# Altium PCB PCB_OP1.PcbDoc
Units mm, origin at the board's own origin, x right, y up, seen from the top; angles counter-clockwise.
Board outline 105.42 x 121.65 mm, 2 copper layers (Top Layer, Bottom Layer), stack 0.532 mm thick; 92 components, 60 nets, 268 pads, 0 vias.
Unrouted connection lines stored in the file: 126.
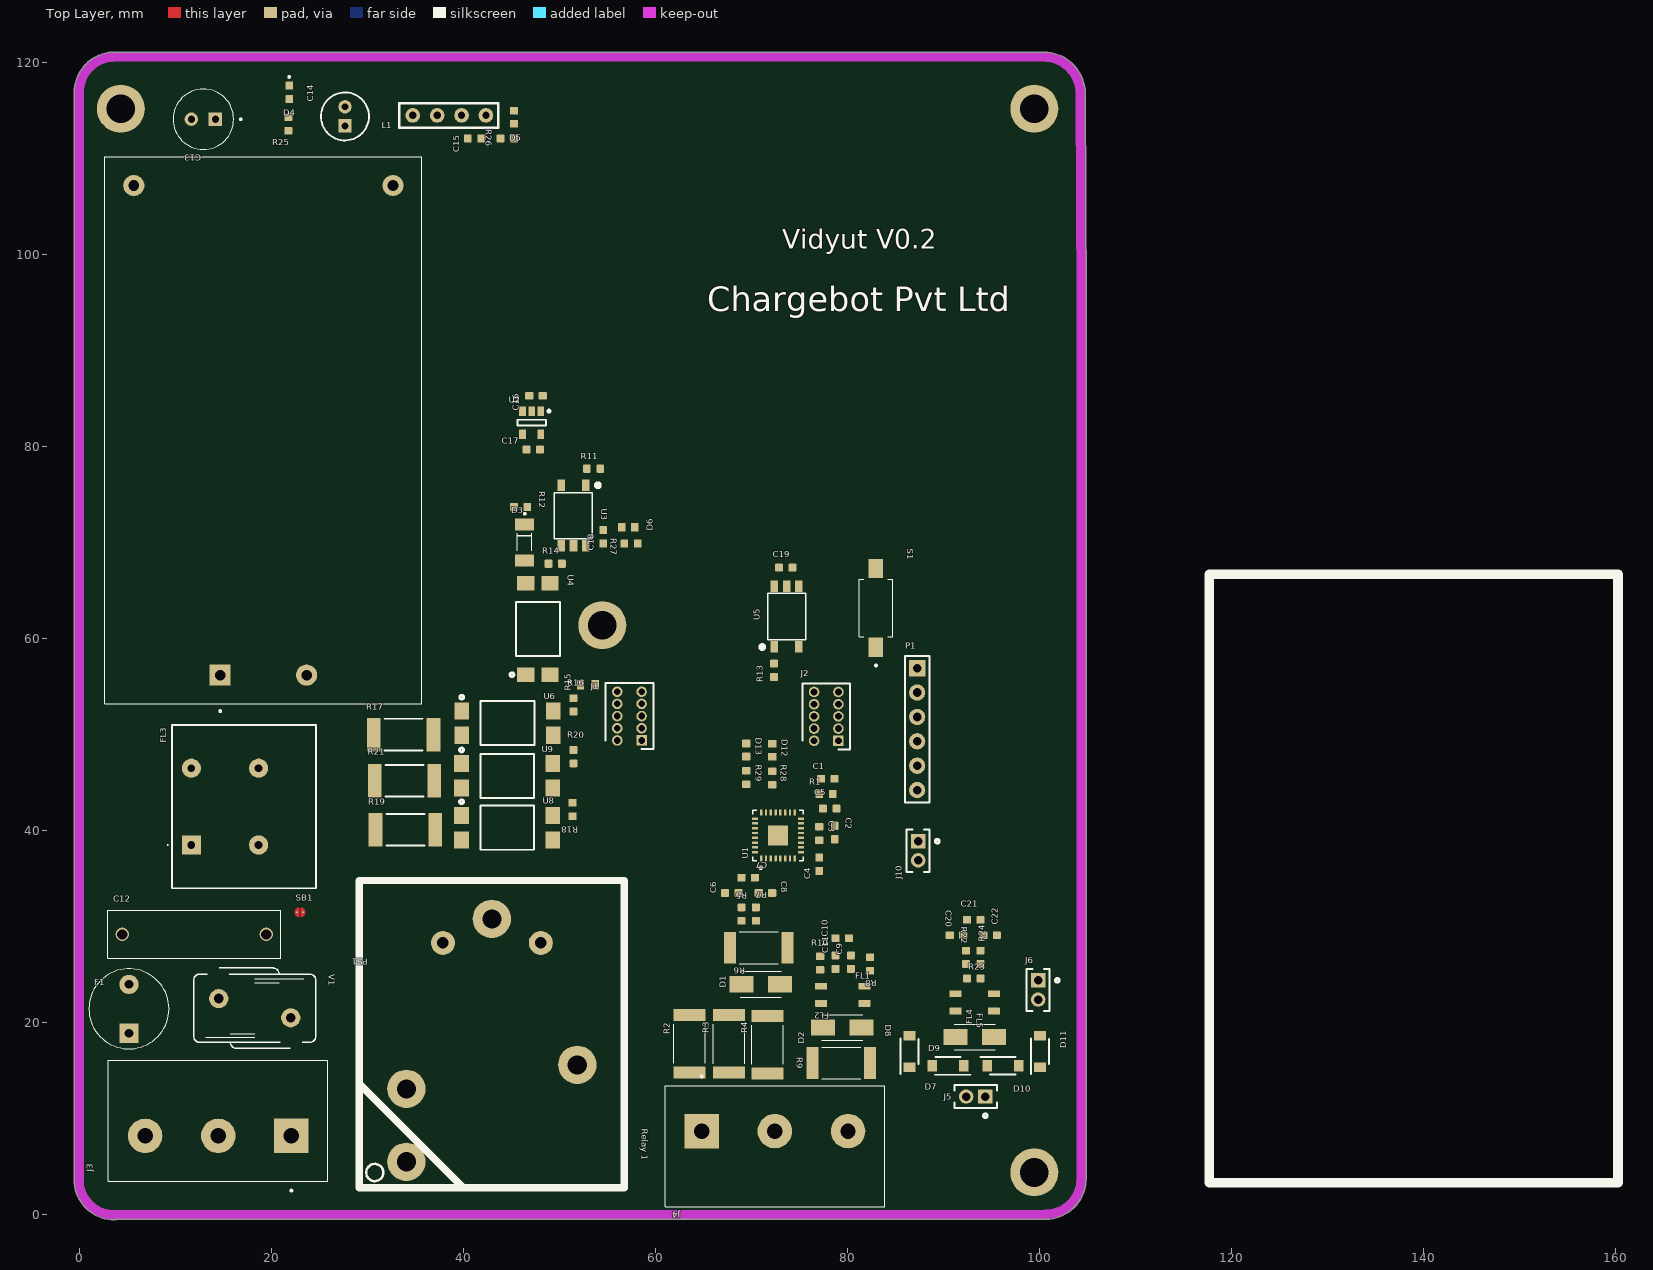
[diagram p0: Top Layer view]
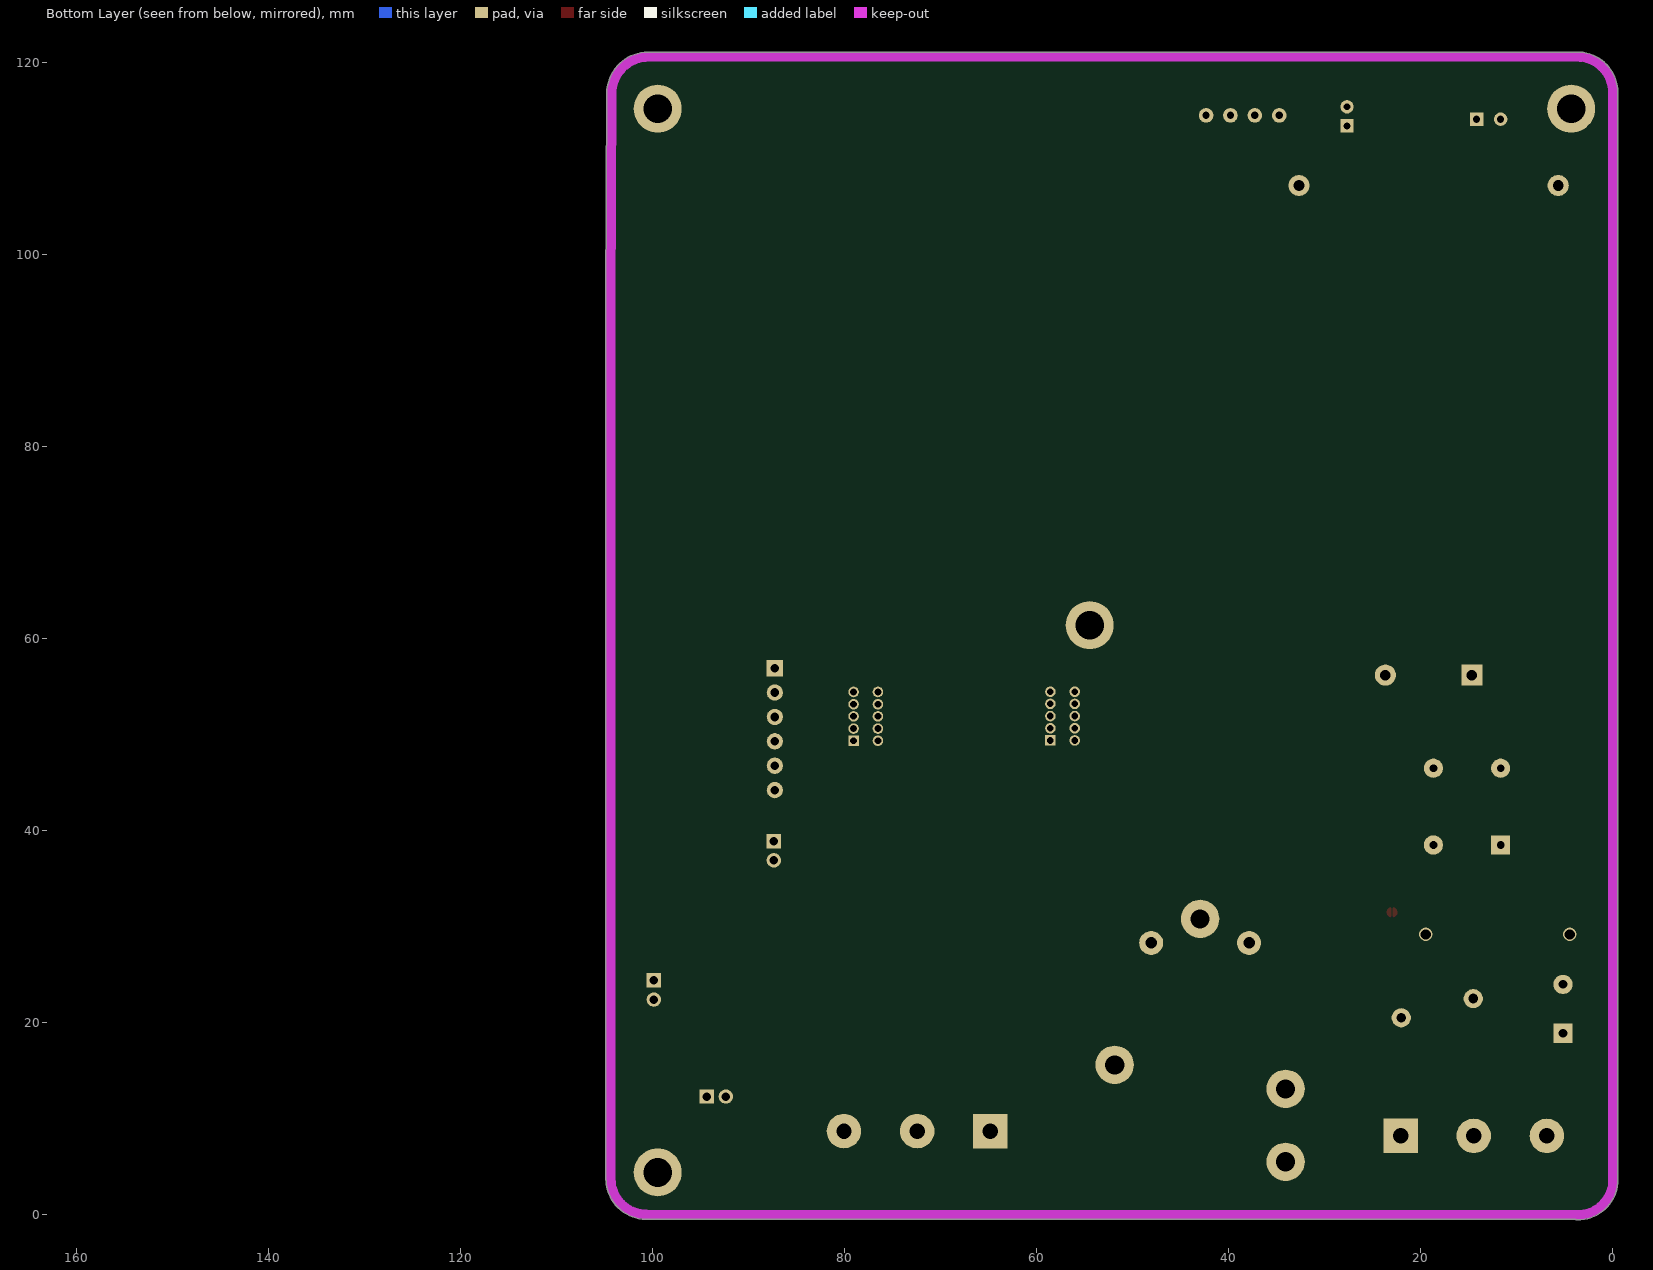
[diagram p1: Bottom Layer view, seen from below]

## Layer stack, top to bottom
Top Solder: solder mask 0.0102, Solder Resist, Dk 3.5
Top Layer: signal copper 0.035
Dielectric 2: prepreg 0.0711, PP-006, Dk 4.1
Dielectric 1: dielectric 0.32, FR-4, Dk 4.8
Dielectric 5: prepreg 0.0711, PP-006, Dk 4.1
Bottom Layer: signal copper 0.035
Bottom Solder: solder mask 0.0102, Solder Resist, Dk 3.5

## Board outline
-0.523,3.653 cw(c-0.023,3.654) -0.5,3.803 -0.5,116.896 cw(c3.703,116.897) 3.094,121.056 cw(c3.3,120.6) 3.3,121.1 3.703,121.1 100.485,121.1 cw(c100.485,120.6) 100.567,121.094 cw(c100.487,116.781) 104.8,116.785 104.9,95.102 104.9,3.7 cw(c104.4,3.7) 104.884,3.572 cw(c100.684,3.719) 100.731,-0.483 cw(c100.6,0) 100.6,-0.5 3.891,-0.5 cw(c3.681,-0.046) 3.682,-0.547 cw(c3.679,3.656)

## Design rules (kind name [scope] priority, off if disabled: settings)
Clearance Clearance_1 [(InNamedPolygon('RELAY_L_OUT_L02_P004') OR InNamedPolygon('N_OUT_L01_P001') OR InNamedPolygon('L_L04_P005') OR InNamedPolygon('N_L01_P000'))] p1: gap=1.27 ignorepadtopadclearanceinfootprint=FALSE except(0: Arc-Hole Track-Hole SMDPad-Hole THPad-Hole Via-Hole Fill-Hole Poly-Hole Region-Hole Text-Hole; 0.127: Arc-Arc Arc-Track Arc-SMDPad Track-Track Track-SMDPad SMDPad-SMDPad; 0.254: Arc-THPad Arc-Via Arc-Text Track-THPad Track-Via Track-Text SMDPad-THPad SMDPad-Via SMDPad-Text THPad-THPad THPad-Via THPad-Text Via-Via Via-Text Fill-Text Poly-Text Region-Text Text-Text)
Clearance [All] p2: gap=0.254 ignorepadtopadclearanceinfootprint=FALSE except(0: Arc-Hole Track-Hole SMDPad-Hole THPad-Hole Via-Hole Fill-Hole Poly-Hole Region-Hole Text-Hole; 0.127: Arc-Arc Arc-Track Arc-SMDPad Track-Track Track-SMDPad SMDPad-SMDPad)
PlaneConnect [All] p1: planeconnectstyle=Direct reliefexpansion=0.508 reliefentries=4 reliefconductorwidth=0.254 reliefairgap=0.254
PolygonConnect PolygonConnect_1 [(InNamedPolygon('L_L02_P005') OR InNamedPolygon('N_L01_P000') OR InNamedPolygon('N_OUT_L01_P001') OR InNamedPolygon('RELAY_L_OUT_L02_P004'))] p1: connectstyle=Direct reliefconductorwidth=0.254 reliefentries=4 polygonreliefangle="90 Angle" airgapwidth=0.254
PolygonConnect [(InNamedPolygon('GND_L02_P008') OR InNamedPolygon('N_L01_P007'))] p2: connectstyle=Relief reliefconductorwidth=0.254 reliefentries=4 polygonreliefangle="90 Angle" airgapwidth=0.254
RoutingVias [All] p1: holewidth=0.254 width=0.61 viastyle="Through Hole" minholewidth=0.254 minwidth=0.61 maxholewidth=0.711 maxwidth=1.27
SolderMaskExpansion [All] p1: expansion=0.102 istentingtop=FALSE
Width [All] p1: maxlimit=0.762 minlimit=0.254 preferedwidth=0.254
29 further rules are at their usual default settings.

## Classes and differential pairs
component class ct_interface: C20 C21 C22 D7 D8 D9 D10 D11 FL4 FL5 J5 J6 R22 R23 R24
component class power: C12 C13 C14 C15 C16 C17 D4 D5 D6 F1 FL3 J1 J2 J3 J4 J10 L1 PS1 R25 R26 R27 SB1 U2 V1
component class interface: C18 C19 D3 R11 R12 R13 R14 R15 R16 R17 R18 R19 R20 R21 Relay1 "Relay 1" U3 U4 U5 U6 U8 U9
component class AFE: C1 C2 C3 C4 C5 C6 C7 C8 C9 C10 C11 D1 D2 D12 D13 FL1 FL2 P1 R1 R2 R3 R4 R5 R6 R7 R8 R9 R10 R28 R29 S1 U1

## Components (designator, comment, footprint, x,y, rotation, side; value= is the part's Value field where it differs from the comment)
C1 "06033G104ZAT4A" CAPC1608X90N 78,45.4 r180 top
C2 "06033G104ZAT4A" CAPC1608X90N 78.7,39.8 r90 top
C3 "10µF" CAP_0603 77.1,39.7 r270 top
C4 "06033G104ZAT4A" CAPC1608X90N 77.1,36.5 r270 top
C5 "C0603C474K8PACTU" CAPC1608X90 78.2,42.3 r0 top value=470uf
C6 "CC0603JRNPO9BN470" CAPC1608X90 68,33.5 r180 top value=47pf
C7 "VJ0603Y153KXAPW1BC" CAPC1608X87N 69.7,35.1 r180 top value=0.015uf
C8 "CC0603JRNPO9BN470" CAPC1608X90 71.5,33.5 r180 top value=47pf
C9 "CC0603JRNPO9BN470" CAPC1608X90 80.4,26.3 r270 top value=47pf
C10 "VJ0603Y153KXAPW1BC" CAPC1608X87N 79.5,28.8 r0 top value=0.015uf
C11 "CC0603JRNPO9BN470" CAPC1608X90 78.8,26.3 r270 top value=47pf
C12 "B32922X2104K000" ? 12,29.2 r0 top
C13 "ECA1CM221" CAPPRD250W50D630H1120 14.2,114.1 r180 top
C14 "ESH475M050AC3AA" CAPPRD200W50D500H1250 27.7,113.4 r90 top
C15 "10µF" CAP_0603 41.2,112.1 r180 top
C16 "06033G104ZAT4A" CAPC1608X90N 47.6,85.3 r0 top
C17 "06033G104ZAT4A" CAPC1608X90N 47.3,79.7 r0 top
C18 "06033G104ZAT4A" CAPC1608X90N 54.6,70.6 r270 top value=0.1uf
C19 "06033G104ZAT4A" CAPC1608X90N 73.6,67.4 r180 top value=0.1uf
C20 "CC0603JRNPO9BN470" CAPC1608X90 91.4,29.1 r180 top value=47pf
C21 "VJ0603Y153KXAPW1BC" CAPC1608X87N 93.2,30.7 r180 top value=0.015uf
C22 "CC0603JRNPO9BN470" CAPC1608X90 94.9,29.1 r0 top value=47pf
D1 "SMAJ5.0CA-13-F" DIOM5126X229N 71,24 r0 top
D2 "SMAJ5.0CA-13-F" DIOM5126X229N 79.5,19.5 r180 top
D3 "LL4148" DIO_LL4148 46.4,70 r270 top
D4 "LTST-C190KRKT" LEDC1608X35N 21.9,116.9 r270 top
D5 "LED-BLUE" LED-0603-GREEN 45.3,114.3 r90 top
D6 "LED-BLUE" LED-0603-BLUE 57.2,71.6 r180 top
D7 "1N4148W_R1_00001" SOD3816X135N 90.5,15.5 r180 top
D8 "1N4148W_R1_00001" SOD3816X135N 86.5,17 r90 top
D9 "SMAJ5.0CA-13-F" DIOM5126X229N 93.3,18.5 r0 top
D10 "1N4148W_R1_00001" SOD3816X135N 96.24,15.5 r0 top
D11 "1N4148W_R1_00001" SOD3816X135N 100.1,17 r90 top
D12 "LED-BLUE" LED-0603-BLUE 72.2,48.375 r90 top
D13 "LED-BLUE" LED-0603-BLUE 69.5,48.4 r90 top
F1 "MRT-500-AMMO" FUSE_MRT-500-AMMO 5.2,18.9 r90 top
FL1 "BLM21BD121SN1D" BEADC2012X105N 81.8,22.9 r90 top
FL2 "BLM21BD121SN1D" BEADC2012X105N 77.3,22.9 r90 top
FL3 "TLF9UAH153W0R2K1" TLF9UAH153W0R2K1 11.7,38.5 r90 top
FL4 "BLM21BD121SN1D" BEADC2012X105N 91.3,22.1 r90 top
FL5 "BLM21BD121SN1D" BEADC2012X105N 95.3,22.1 r90 top
J1 "TMS-105-01-L-D" HDRV10W51P254X127_2X5_635X498X838P 58.6,49.39 r90 top
J2 "TMS-105-01-L-D" HDRV10W51P254X127_2X5_635X498X838P 79.1,49.36 r90 top
J3 "TB005_-762-03BE" "CUI_TB005 -762-03BE" 22.12,8.2 r180 top
J4 "TB005_-762-03BE" "CUI_TB005 -762-03BE" 64.86,8.7 r0 top
J5 "MTMM-101-10-G-D-135" SAMTEC_MTMM-101-10-G-D-135 93.4,12.3 r90 top
J6 "MTMM-101-10-G-D-135" SAMTEC_MTMM-101-10-G-D-135 99.9,23.4 r180 top
J10 "MTMM-101-10-G-D-135" SAMTEC_MTMM-101-10-G-D-135 87.4,37.9 r180 top
L1 "hlk-1d0505" PCBComponent_1 34.76,114.5 r0 top
P1 "Header 6" HDR1X6 87.3,56.92 r270 top
PS1 "HLK-20M05" CONV_HLK-20M05 14.7,56.2 r90 top
R1 "RC0603FR-0747KL" RESC1608X55 77.8,43.8 r0 top value=47K
R2 "CRCW2512330KFKEG" RESC6331X70N 63.6,17.8 r90 top value=330K
R3 "CRCW2512330KFKEG" RESC6331X70N 67.7,17.79 r270 top value=330K
R4 "CRCW2512330KFKEG" RESC6331X70N 71.7,17.69 r90 top value=330K
R5 "CR0603-FX-1000ELF" RESC1608X55N 69,31.3 r90 top value=100
R6 "CRCW25121K50JNEG" RESC6331X70N 70.8,27.8 r180 top value=1.5K
R7 "CR0603-FX-1001ELF" RESC1608X55N 70.5,31.3 r90 top value=1K
R8 "CR0603-FX-1001ELF" RESC1608X55N 82.4,26.1 r90 top value=1K
R9 "2-1879378-6" RESC6331X70N 79.4,15.8 r0 top value=0.5m
R10 "CR0603-FX-1001ELF" RESC1608X55N 77.2,26.2 r90 top value=1K
R11 "RC0603FR-0710KL" RESC1607X60N 53.6,77.7 r0 top
R12 "RC0603FR-0720RL" RESC1607X60N 46,73.7 r180 top value=20
R13 "RC0603FR-0710KL" RESC1607X60N 72.4,56.7 r90 top value=10k
R14 "RC0603FR-0710KL" RESC1607X60N 49.6,67.8 r180 top
R15 "CRCW060350R0FKEA" RESC1508X50N 53,55.2 r180 top value=50
R16 "RC0603FR-0720RL" RESC1607X60N 51.5,53.1 r90 top value=20
R17 "25121WJ0563T4E" FP-CRCW2512-E3-MFG 33.8,50 r0 top
R18 "RC0603FR-0720RL" RESC1607X60N 51.4,42.2 r90 top value=20
R19 "25121WJ0563T4E" FP-CRCW2512-E3-MFG 34,40.1 r0 top
R20 "RC0603FR-0720RL" RESC1607X60N 51.5,47.7 r90 top value=20
R21 "25121WJ0563T4E" FP-CRCW2512-E3-MFG 33.9,45.2 r0 top
R22 "CR0603-FX-1001ELF" RESC1608X55N 92.4,26.8 r270 top value=1K
R23 "CR0603-FX-1001ELF" RESC1608X55N 93.2,24.6 r180 top value=13
R24 "CR0603-FX-1001ELF" RESC1608X55N 93.9,26.8 r270 top value=1K
R25 "SR0603KR-7W270RL" RESC1608X55N 21.8,113.6 r90 top
R26 "SR0603KR-7W270RL" RESC1608X55N 44.6,112.1 r0 top
R27 "SR0603KR-7W270RL" RESC1608X55N 57.5,69.9 r180 top
R28 "SR0603KR-7W270RL" RESC1608X55N 72.2,45.48 r270 top
R29 "SR0603KR-7W270RL" RESC1608X55N 69.5,45.52 r270 top
"Relay 1" "SLA-05VDC-SL-C" SLA-5VDC-SLC 43,30.8 r180 top
S1 "PTS636_SM43_SMTR_LFS" PTS636SM43SMTRLFS 83,63.2 r90 top
SB1 "Solderbridge" SOLDERBRIDGE_OPEN 22.7,31.5 r0 top
U1 "MSP430I2040TRHBR" RHB32_TEX 72.8,39.5 r90 top
U2 "NCP115ASN330T2G" NCP115 47.15,82.5 r270 top
U3 "TLP2395" "5PIN SO6_TOS" 51.5,72.8 r270 top
U4 "VO617A-2X017T" SOIC254P1016X440-4N 47.8,61 r90 top
U5 "TLP2395" "5PIN SO6_TOS" 73.7,62.3 r90 top
U6 "VO617A-2X017T" SOIC254P1016X440-4N 44.625,51.2 r0 top
U8 "VO617A-2X017T" SOIC254P1016X440-4N 44.6,40.3 r0 top
U9 "VO617A-2X017T" SOIC254P1016X440-4N 44.6,45.7 r0 top
V1 "MOV-10D561K" MOV-10D561 18.3,21.5 r270 top

## Footprints (in the part's own frame and the unit in brackets; to place one, negate y for a bottom-side part, rotate by r counter-clockwise, add the part's x,y. Pads: shape width x height; smd on the part's side, far side on the other; paste and mask are expansions set on the pad)
"5PIN SO6_TOS" [mm]
  rect 1.2x0.8 smd paste+0 mask+0: 1(-3.15,1.27) 3(-3.15,-1.27) 4(3.15,-1.27) 5(3.15,0) 6(3.15,1.27)
  silkscreen extent -3.37,-1.98 2.4,2.74, body extent -3.5,-1.85 3.5,1.85, height 2.2
BEADC2012X105N [mm]
  rrect10% 0.7x1.25 smd mask+0.076: 1(-0.9,0) 2(0.9,0)
  body extent -1,-0.63 1,0.63, height 1.05
CAP_0603 [mm]
  rrect25% 0.8x0.85 smd mask+0.076: 1(-0.7,0) 2(0.7,0)
  body extent -0.8,-0.4 0.8,0.4, height 0.78
CAPC1608X87N [mm]
  rrect25% 0.85x0.8 smd mask+0.076: 1(-0.7,0) 2(0.7,0)
  body extent -0.86,-0.41 0.74,0.39, height 0.9
CAPC1608X90 [mm]
  rrect25% 0.85x0.8 smd mask+0.076: 1(-0.7,0) 2(0.7,0)
  body extent -0.8,-0.4 0.8,0.4, height 0.9
CAPC1608X90N [mm]
  rrect25% 0.85x0.8 smd mask+0.076: 1(-0.7,0) 2(0.7,0)
  body extent -0.8,-0.4 0.8,0.4, height 0.9
CAPPRD200W50D500H1250 [mm]
  rect 1.4x1.4 hole 0.7: 1(0,0)
  round 1.4 hole 0.7: 2(2,0)
  silkscreen extent -1.5,-2.5 3.49,2.5, body extent -1.75,-2.75 3.75,2.75, height 12.51
CAPPRD250W50D630H1120 [mm]
  round 1.4 hole 0.75: N(2.5,0)
  rect 1.4x1.4 hole 0.75: P(0,0)
  silkscreen extent -2.75,-3.15 4.4,3.15, body extent -1.9,-3.15 4.4,3.15, height 11.2
CONV_HLK-20M05 [mm]
  rect 2.2x2.2 hole 1.1: 1(0,0)
  round 2.2 hole 1.1: 2(0,-9) 3(51,9) 4(51,-18)
  silkscreen extent -3.85,-21 54,12, body extent -3,-21 54,12, height 22.5
"CUI_TB005 -762-03BE" [mm]
  rect 3.6x3.6 hole 1.6: 1(0,0)
  round 3.6 hole 1.6: 2(7.62,0) 3(15.24,0)
  silkscreen extent -3.79,-7.9 19.07,5.8
DIO_LL4148 [mm]
  rrect10% 1.25x2 smd mask+0.076: A(1.875,0) C(-1.875,0)
  silkscreen extent -3.11,-0.75 0.83,0.75, body extent -1.73,-0.75 1.73,0.75, height 1.5
DIOM5126X229N [mm]
  rect 2.5x1.7 smd mask+0.076: 1(-2,0) 2(2,0)
  silkscreen extent -2.12,-1.33 2.12,1.33
FP-CRCW2512-E3-MFG [mm]
  rect 1.45x3.5 smd paste+0 mask+0: 1(-3.1,0) 2(3.1,0)
  silkscreen extent -2,-1.65 2,1.65, body extent -3.93,-1.85 3.93,1.85, height 0.25
FUSE_MRT-500-AMMO [mm]
  rect 2x2 hole 0.9: 1(0,0)
  round 2 hole 0.9: 2(5.08,0)
  silkscreen extent -1.63,-4.18 6.71,4.18
HDR1X6 [mm] "Connector; Header; 6 Position"
  rect 1.7x1.7 hole 0.9 mask+0.076: 1(0,0)
  round 1.7 hole 0.9 mask+0.076: 2(2.54,0) 3(5.08,0) 4(7.62,0) 5(10.16,0) 6(12.7,0)
  silkscreen extent -1.27,-1.27 13.97,1.27
HDRV10W51P254X127_2X5_635X498X838P [mm]
  rect 1.1x1.1 hole 0.7 mask+0.076: 1(0,0)
  round 1.1 hole 0.7 mask+0.076: 2(0,2.54) 3(1.27,0) 4(1.27,2.54) 5(2.54,0) 6(2.54,2.54) 7(3.81,0) 8(3.81,2.54) 9(5.08,0) 10(5.08,2.54)
  silkscreen extent -0.9,-1.22 5.98,3.76, body extent -0.64,-1.22 5.71,3.76, height 8.38
LED-0603-BLUE [mm]
  rrect10% 0.8x0.85 smd: 1(-0.675,0) 2(0.675,0)
  body extent -0.93,-0.4 0.67,0.4, height 0.6
LED-0603-GREEN [mm]
  rrect10% 0.8x0.85 smd: 1(-0.675,0) 2(0.675,0)
  body extent -0.93,-0.4 0.67,0.4, height 0.6
LEDC1608X35N [mm]
  rrect25% 0.85x0.8 smd mask+0.076: A(0.7,0) C(-0.7,0)
  silkscreen extent -1.71,-0.11 -1.51,0.09, body extent -0.8,-0.4 0.8,0.4, height 0.8
MOV-10D561 [mm]
  round 2 hole 1.016 mask+0.076: 1(-1,-3.75) 2(1,3.75)
  silkscreen extent -4.19,-6.35 4.19,6.35, body extent -2,-6.25 2,6.25, height 15.5
NCP115 [mm]
  rect 1x0.7 smd: 1(-1.2,0.95) 2(-1.2,0) 3(-1.2,-0.95) 4(1.2,-0.95) 5(1.2,0.95)
  silkscreen extent -1.32,-1.5 0.3,1.93, body extent -0.7,-1.5 0.7,1.5, height 1.1
PCBComponent_1 [mil]
  round 60 hole 30: 1(0,0) 2(100,0) 3(200,0) 4(300,0)
  silkscreen extent -55,-50 350,50
PTS636SM43SMTRLFS [mm]
  rect 2x1.5 smd: 1(-4.1,0) 2(4.1,0)
  silkscreen extent -6.1,-1.75 3,1.75, body extent -3.55,-1.75 3.55,1.75, height 4.3
RESC1508X50N [mm]
  rect 0.75x1 smd: 1(-0.765,0) 2(0.765,0)
  body extent -0.77,-0.43 0.77,0.43, height 0.5
RESC1607X60N [mm]
  rrect25% 0.8x0.85 smd mask+0.076: 1(-0.7,0) 2(0.7,0)
  body extent -0.8,-0.4 0.8,0.4, height 0.78
RESC1608X55 [mm]
  rrect25% 0.8x0.85 smd mask+0.076: 1(-0.7,0) 2(0.7,0)
  body extent -0.8,-0.4 0.8,0.4, height 0.78
RESC1608X55N [mm]
  rrect25% 0.8x0.85 smd mask+0.076: 1(-0.7,0) 2(0.7,0)
  body extent -0.8,-0.4 0.8,0.4, height 0.78
RESC6331X70N [mm]
  rect 1.24x3.32 smd mask+0.076: 1(-2.99,0) 2(2.99,0)
  silkscreen extent -2.05,-1.65 2.05,1.65, body extent -3.15,-1.57 3.15,1.57, height 0.7
RHB32_TEX [mm]
  rrect10% 0.6x0.25 smd paste+0 mask+0: 1(-2.4,1.75) 2(-2.4,1.25) 3(-2.4,0.75) 4(-2.4,0.25) 5(-2.4,-0.25) 6(-2.4,-0.75) 7(-2.4,-1.25) 8(-2.4,-1.75) 17(2.4,-1.75) 18(2.4,-1.25) 19(2.4,-0.75) 20(2.4,-0.25) 21(2.4,0.25) 22(2.4,0.75) 23(2.4,1.25) 24(2.4,1.75)
  rrect10% 0.25x0.6 smd paste+0 mask+0: 9(-1.75,-2.4) 10(-1.25,-2.4) 11(-0.75,-2.4) 12(-0.25,-2.4) 13(0.25,-2.4) 14(0.75,-2.4) 15(1.25,-2.4) 16(1.75,-2.4) 25(1.75,2.4) 26(1.25,2.4) 27(0.75,2.4) 28(0.25,2.4) 29(-0.25,2.4) 30(-0.75,2.4) 31(-1.25,2.4) 32(-1.75,2.4)
  rect 2.1x2.1 smd paste-1.687 mask+0: 33(0,0)
  silkscreen extent -3.48,-2.63 2.63,2.63, body extent -2.5,-2.5 2.5,2.5, height 1
SAMTEC_MTMM-101-10-G-D-135 [mm]
  rect 1.5x1.5 hole 0.89: 01(0,-1)
  round 1.5 hole 0.89: 02(0,1)
  silkscreen extent -2.2,-2.2 1.2,2.2
SLA-5VDC-SLC [mm] "Relay 5V - 30A"
  round 2.5 hole 1.2: 1(-5.1,2.5) 2(5.1,2.5)
  round 4 hole 2: 3(8.9,25.3) 4(-8.9,15.2) 4(0,0) 5(8.9,17.7)
  silkscreen extent -13.8,-4 13.8,28
SOD3816X135N [mm]
  rect 0.97x1.22 smd mask+0.076: 1(-1.64,0) 2(1.64,0)
  silkscreen extent -2.35,-0.92 1.32,0.93, body extent -1.88,-0.8 1.88,0.8, height 1.35
SOIC254P1016X440-4N [mm]
  rect 1.52x1.78 smd: 1(-4.76,1.27) 2(-4.76,-1.27) 3(4.76,-1.27) 4(4.76,1.27)
  silkscreen extent -4.96,-2.29 2.8,2.9, body extent -5.08,-2.29 5.08,2.29, height 1.75
SOLDERBRIDGE_OPEN [mm]
  round 0.2 smd paste-10: 1(0,0) 2(0.625,0)
  Top Layer region: 0.389,0.432 0.465,0.505 0.583,0.467 0.648,0.424 0.721,0.351 0.775,0.292 0.833,0.193 0.861,0.099 0.856,-0.122 0.831,-0.193 0.747,-0.33 0.663,-0.411 0.571,-0.469 0.47,-0.5 0.419,-0.483 0.389,-0.43
  Top Layer region: 0.236,-0.432 0.16,-0.505 0.042,-0.467 -0.023,-0.424 -0.097,-0.351 -0.15,-0.292 -0.208,-0.193 -0.236,-0.099 -0.231,0.122 -0.206,0.193 -0.122,0.33 -0.038,0.411 0.054,0.469 0.155,0.5 0.206,0.483 0.236,0.43
  Top Layer lines w0.152: 0.159,-0.431 cw(c0.27,0) -0.175,0 cw(c0.27,0) 0.159,0.431 ; 0.465,-0.431 ccw(c0.355,0) 0.799,0 ccw(c0.355,0) 0.782,0.122 ccw(c0.355,0) 0.465,0.431
TLF9UAH153W0R2K1 [mm]
  rect 2x2 hole 0.8: 1(0,0)
  round 2 hole 0.8: 2(8,0) 3(8,-7) 4(0,-7)
  silkscreen extent -4.5,-13 12.5,2.5, body extent -4.5,-13 12.5,2, height 12.1
? [mm]
  round 1.4 hole 1.05: 1(-7.5,0) 2(7.5,0)
  silkscreen extent -9,-2.5 9,2.5

## Part data
C1 C2 C4 C16 C17 C18 C19: "Cap Ceramic 0.1uF 25V Y5V -20% to 80% SMD 0603 85C T/R", Package=None, Availability=Unavailable, MF="{'manufacturer': u'AVX'}", MP=06033G104ZAT4A, Price=None
C3 C15: library part CL10A106KP8NNNC, "10µF 10V Ceramic Capacitor X5R 0603 (1608 Metric) 0.063\" L x 0.031\" W (1.60mm x 0.80mm)", Manufacturer="Samsung Electronics", Supplier Part Number 1=1276-1192-1-ND, Part Number=CL10A106KP8NNNC, Supplier 1=Digi-Key
C5: "CAP, MLCC, X5R, 0.47UF, 10V, 0603", Package=None, Availability=Unavailable, MF="{'manufacturer': u'KEMET'}", MP=C0603C474K8PACTU, Price=None
C6 C8 C9 C11 C20 C22: "CAP CER 47PF 50V C0G/NPO 0603", Package=None, Availability=Unavailable, MF="{'manufacturer': u'Yageo'}", MP=CC0603JRNPO9BN470, Price=None
C7 C10 C21: "VJ_W1BC", Package=None, Availability=Unavailable, MF="{'manufacturer': u'Vishay Vitramon'}", MP=VJ0603Y153KXAPW1BC, Price=None
C12 J3 J4 J5 J6 J10 PS1 R2 R3 R4 R6 R25 R26 R27 R28 R29 U4 U6 U8 U9 V1: Package=None, Availability=Unavailable, Price=None
  C12: MF="{'manufacturer': u'TDK ELECTRONICS'}", MP=B32922X2104K000
  J3 J4: MF="{'manufacturer': u'CUI'}", MP="TB005 -762-03BE"
  J5 J6 J10: MF="{'manufacturer': u'Samtec'}", MP=MTMM-101-10-G-D-135
  PS1: MF="{'manufacturer': u'Hi-link'}", MP=HLK-20M05
  R2 R3 R4: MF="{'manufacturer': u'Vishay'}", MP=CRCW2512330KFKEG
  R6: MF="{'manufacturer': u'Vishay'}", MP=CRCW25121K50JNEG
  R25 R26 R27 R28 R29: MF="{'manufacturer': u'Yageo'}", MP=SR0603KR-7W270RL
  U4 U6 U8 U9: MF="{'manufacturer': u'Vishay Semiconductor'}", MP=VO617A-2X017T
  V1: MF="{'manufacturer': u'Bourns'}", MP=MOV-10D561K
C13: "M-A", Package=None, Availability=Unavailable, MF="{'manufacturer': u'Panasonic Electronic'}", MP=ECA1CM221, Price=None
C14: "Capacitor Polarised", Manufacturer_Name=KEMET, Mouser Part Number=80-ESH475M050AC3AA, Arrow Part Number=ESH475M050AC3AA, Arrow Price/Stock=https://www.arrow.com/en/products/esh475m050ac3aa/kemet-corporation, Datasheet Link=https://content.kemet.com/datasheets/KEM_A4005_ESH.pdf, Height=12.5mm, Manufacturer_Part_Number=ESH475M050AC3AA, Mouser Price/Stock=https://www.mouser.co.uk/ProductDetail/KEMET/ESH475M050AC3AA?qs=w9hhVRgtvfkPodqB3cTTeQ%3D%3D
D1 D2 D9: "9.2V Clamp 43.5A Ipp Tvs Diode Surface Mount SMA (DO-214AC)", Package=None, Availability=Unavailable, MF="{'manufacturer': u'Diodes Inc.'}", MP=SMAJ5.0CA-13-F, Price=None
D3: "Surface Mount Switching Glass", Package=None, Availability=Unavailable, MF="{'manufacturer': u'ON'}", MP=LL4148, Price=None
D4: "LED; SMD; 0603; red; 18-180mcd; 1.6x0.8x0.8mm; 130Â°; 1.6Ã·2.4V; 20mA", Package=None, Availability=Unavailable, MF="{'manufacturer': u'Lite-On Inc.'}", MP=LTST-C190KRKT, Price=None
D5: library part LTST-C191KGKT, "LED GREEN CLEAR 0603 SMD", Manufacturer=Lite-On, Supplier Part Number 1=160-1446-1-ND, Part Number=LTST-C191KGKT, Supplier 1=Digi-Key
D6 D12 D13: library part LTST-C193TBKT-5A, "Blue 470nm LED Indication - Discrete 2.8V 0603 (1608 Metric)", Manufacturer=Lite-On, Supplier Part Number 1=160-1827-1-ND, Part Number=LTST-C193TBKT-5A, Supplier 1=Digi-Key
D7 D8 D10 D11: "Diode", Manufacturer_Name=PANJIT, Mouser Part Number=241-1N4148W_R1_00001, Datasheet Link=https://www.mouser.com/datasheet/2/1057/1N4148W-1869619.pdf, Height=1.35mm, Manufacturer_Part_Number=1N4148W_R1_00001, Mouser Price/Stock=https://www.mouser.co.uk/ProductDetail/Panjit/1N4148W_R1_00001?qs=sPbYRqrBIVnqVztCqPNVrw%3D%3D
F1: "MRF 1-BULK (0691-1000-01)", Package=None, Availability=Unavailable, MF="{'manufacturer': u'Bel Fuse'}", MP=MRT-500-AMMO, Price=None
FL1 FL2 FL4 FL5: "Ferrite: bead; 120Î©; Mounting: SMD; 200mA; -55Ã·125Â°C", Package=None, Availability=Unavailable, MF="{'manufacturer': u'Murata Electronics'}", MP=BLM21BD121SN1D, Price=None
FL3: "Filter", Manufacturer_Name="TAIYO YUDEN", Mouser Part Number=963-TLF9UAH153W0R2K1, Datasheet Link=http://www.yuden.co.jp/productdata/catalog/coil04_e.pdf, Height=12mm, Manufacturer_Part_Number=TLF9UAH153W0R2K1, Mouser Price/Stock=https://www.mouser.com/Search/Refine.aspx?Keyword=963-TLF9UAH153W0R2K1
J1 J2: "Connector", Manufacturer_Name=SAMTEC, Mouser Part Number=200-TMS10501LD, Arrow Part Number=TMS-105-01-L-D, Arrow Price/Stock=https://www.arrow.com/en/products/tms-105-01-l-d/samtec, Datasheet Link=http://suddendocs.samtec.com/catalog_english/tms_th.pdf, Height=8.38mm, Manufacturer_Part_Number=TMS-105-01-L-D, Mouser Price/Stock=https://www.mouser.com/Search/Refine.aspx?Keyword=200-TMS10501LD
P1: "Header, 6-Pin", LatestRevisionDate=17-Jul-2002, LatestRevisionNote="Re-released for DXP Platform.", Publisher="Altium Limited"
R1: "RC Series 0603 0.1 W 47 kOhms 1% Â±100 ppm/Â°C SMT Thick Film Chip Resistor", Package=None, Availability=Unavailable, MF="{'manufacturer': u'Yageo'}", MP=RC0603FR-0747KL, Price=None
R5: "SMD 0603 thick film resistor 100R 1%", Package=None, Availability=Unavailable, MF="{'manufacturer': u'Bourns'}", MP=CR0603-FX-1000ELF, Price=None
R7 R8 R10 R22 R23 R24: "Resistor; Thick Film; Res 1 Kilohms; Pwr-Rtg 0.1 W; Tol 1%; SMT; 0603", Package=None, Availability=Unavailable, MF="{'manufacturer': u'Bourns'}", MP=CR0603-FX-1001ELF, Price=None
R9: "TLR 2512 1.0W R0005 1% 50PPM 2K RL", Package=None, Availability=Unavailable, MF="{'manufacturer': u'TE Connectivity'}", MP=2-1879378-6, Price=None
R11 R13 R14: "YAGEO RC0603FR-0710KL / RESISTOR 10K 1/10W 1% 0603 YAG", Package=None, Availability=Unavailable, MF="{'manufacturer': u'Yageo'}", MP=RC0603FR-0710KL, Price=None
R12 R16 R18 R20: "RC Series 0603 0.1 W 20 Ohms 1% Â±100 ppm/Â°C SMT Thick Film Chip Resistor", Package=None, Availability=Unavailable, MF="{'manufacturer': u'Yageo'}", MP=RC0603FR-0720RL, Price=None
R15: "Res Thick Film 0603 50 Ohm 1% 1/10W Â±100ppm/Â°C Molded SMD SMD Paper T/R", Package=None, Availability=Unavailable, MF="{'manufacturer': u'Vishay Dale'}", MP=CRCW060350R0FKEA, Price=None
R17 R19 R21: library part CMP-02407-004199-1, "Thick Film Resistors - SMD 2512 1W 5% 56K T/R-4000", Case Code (Imperial)=2512, Case Code (Metric)=6432, Max Operating Temperature=155°C, Max Power Dissipation=1W, Min Operating Temperature=-55°C, Package Quantity=2000, Resistance=100kR, Temperature Coefficient=100ppm/°C, Tolerance=1%, Voltage Rating=500V, Case/Package=2512, Composition="Thick Film", Contact Plating=Tin, Depth=3.15mm, Features="Automotive AEC-Q200", Height=0.6mm, Lead Free="Lead Free", Length=6.3mm, Military Standard=Not, Number of Pins=2, Number of Terminations=2, Packaging="Tape and Reel", Power Rating=1W, Radiation Hardening=No, Termination=SMD/SMT, Voltage Rating (DC)=500V, Weight=0.001429oz, Width=3.15mm
S1: "Switch", Arrow Part Number="PTS636 SM43 SMTR LFS", Manufacturer_Name="C & K COMPONENTS", Mouser Part Number=611-PTS636SM43SMTRLF, Arrow Price/Stock=https://www.arrow.com/en/products/pts636-sm43-smtr-lfs/ck, Datasheet Link="https://componentsearchengine.com/Datasheets/1/PTS636 SM43 SMTR LFS.pdf", Height=4.5mm, Manufacturer_Part_Number="PTS636 SM43 SMTR LFS", Mouser Price/Stock=https://www.mouser.co.uk/ProductDetail/CK/PTS636-SM43-SMTR-LFS?qs=vLWxofP3U2xu5raMGkTmHg%3D%3D
SB1: library part SOLDERBRIDGE_OPEN_1, "Open Solderbridge", Artikkelnr Noca=N.A., Artikkelnr Simpro=N.A., Footprint Doc=Solderbridge, LatestRevisionDate=2009-12-14, Part Number=Solderbridge, Pin Count=2, Published=2009-12-14, Publisher="Nordic Semiconductor"
U1: "No Description Available", Mfr_Name="Texas Instruments", Copyright="Copyright (C) 2022 Ultra Librarian. All rights reserved.", Manufacturer_Part_Number=MSP430I2040TRHBR, RefDes=RefDes, Type=DEV
U3 U5: "No Description Available", Mfr_Name="Toshiba Electronic Devices & Storage Corp.", Number_devices_in_Package=1, Copyright="Copyright (C) 2022 Ultra Librarian. All rights reserved.", Manufacturer_Part_Number=TLP2395, RefDes=RefDes, Source_Package=TLP2395, Type=DEV

## Free pads (board coordinates)
  round 5 hole 3 unplated: MH1(4.35,115.2) MH1(54.5,61.4) MH1(99.5,115.2) MH1(99.5,4.4)

## Nets (pads, with @x,y where several pads share a name; then routed paths per layer and width w, separated by ;. In a path a pad name is that pad's centre, name@x,y a point inside that pad or via, vN(x,y) a via of type N, cw(c..) or ccw(c..) an arc to the next point about the centre after c; other vN are vias at no path point)
3.3v: C19.2 J1.1 R16.2 R18.2 R20.2 U5.6
3.3V_AFE: C2.2 C3.1 C17.2 C18.2 D7.1 D10.1 P1.3 R1.2 R27.2 U1.13 U2.5 U3.6
+5: C13.P C14.1 J2.1 L1.2 PS1.4 R25.1
+5_AFE: C15.1 C16.2 D3.C L1.4 R12.1 R26.1 U2.1 U2.3
AFE_RX: U1.19 U3.5
AFE_SBWTCK: P1.1 U1.16
AFE_SWTDIO: C1.2 P1.6 R1.1 S1.1 U1.15
AFE_TX: R13.1 U1.20
D_GND: C13.N C14.2 C19.1 D4.C J1.10 J2.10 L1.1 PS1.3 R15.1 U3.3 U5.4 U6.3 U8.3 U9.3
DECT_1: J1.6 R16.1 U6.4
DECT_2: J1.5 R18.1 U8.4
DECT_3: J1.7 R20.1 U9.4
E: J3.2 R19.1 U6.2
E_OUT: J4.2
GND: C1.1 C2.1 C3.2 C5.2 C15.2 C16.1 C17.1 C18.1 C20.2 C22.2 D5.2 D6.2 D12.2 D13.2 J10.01 L1.3 P1.2 R14.1 S1.2 U1.12 U1.33 U2.2 U3.4 U5.3
I1+: C20.1 C21.2 R22.1 U1.5
I1-: C21.1 C22.1 R24.1 U1.6
I+: C10.1 C11.1 R10.2 U1.3
I-: C9.1 C10.2 R8.2 U1.4
IO_IN: J2.5 U1.17
IO_OUT: J2.6 U1.18
L: "Relay 1.4" F1.1 J3.3 R17.1 R21.1
MCU_RX: J1.4 U5.5
MCU_TX: J1.2 R11.2
N: C4.1 C6.2 C8.1 C9.2 C11.2 C12.2 D1.2 D2.1 D8.2 D11.2 FL1.1 FL3.4 J3.1 J6.02 J10.02 R6.1 R7.1 R9.2 SB1.1 SB1.2 U1.10 U8.2 U9.2 V1.2
N_OUT: D2.2 FL2.1 J4.3 R9.1
NetC4_2: C4.2 U1.9
NetC5_1: C5.1 U1.14
NetC12_1: C12.1 F1.2 FL3.1 V1.1
NetD1_1: D1.1 R4.2 R5.1 R6.2
NetD3_A: D3.A U4.4
NetD4_A: D4.A R25.2
NetD5_1: D5.1 R26.2
NetD6_1: D6.1 R27.1
NetD7_2: D7.2 D8.1 D9.1 FL4.1 J5.02
NetD9_2: D9.2 D10.2 D11.1 FL5.1 J5.01
NetD12_1: D12.1 R28.1
NetD13_1: D13.1 R29.1
NetFL1_2: FL1.2 R8.1
NetFL2_2: FL2.2 R10.1
NetFL3_2: FL3.2 PS1.1
NetFL3_3: FL3.3 PS1.2
NetFL4_2: FL4.2 R22.2 R23.2
NetFL5_2: FL5.2 J6.01 R23.1 R24.2
NetR2_2: R2.2 R3.1
NetR3_2: R3.2 R4.1
NetR11_1: R11.1 U3.1
NetR12_2: "Relay 1.1" R12.2
NetR13_2: R13.2 U5.1
NetR14_2: "Relay 1.2" R14.2 U4.3
NetR15_2: R15.2 U4.2
NetR17_2: R17.2 U6.1
NetR19_2: R19.2 U8.1
NetR21_2: R21.2 U9.1
NetR28_2: R28.2 U1.21
NetR29_2: R29.2 U1.22
RELAY_CONTROL: J1.3 U4.1
RELAY_L_OUT: "Relay 1.5" J4.1 R2.1
V+: C6.1 C7.2 R5.2 U1.1
V-: C7.1 C8.2 R7.2 U1.2
pads on no net: "Relay 1.3" J1.8 J1.9 J2.2 J2.3 J2.4 J2.7 J2.8 J2.9 P1.4 P1.5 U1.7 U1.8 U1.11 U1.23 U1.24 U1.25 U1.26 U1.27 U1.28 U1.29 U1.30 U1.31 U1.32 U2.4

## Keep-outs
Keep-Out Layer:
  lines w1: -0.023,3.654 ccw(c3.679,3.656) 3.681,-0.046 ; 0,3.3 0,116.896 cw(c3.702,116.898) 3.7,120.6 ; 3.3,0 100.6,0 ; 3.3,120.6 100.485,120.6 ; 100.485,120.594 cw(c100.487,116.781) 104.3,116.784 104.4,95.1 104.4,3.7 ; 100.686,0.017 ccw(c100.684,3.719) 104.386,3.722

## Silkscreen, mask and mechanical layers (free items; w line width, h text height)
Top Overlay:
  lines w1: 117.736,3.31 160.3,3.31 160.3,66.7 117.736,66.7 117.736,3.31
  text "Vidyut V0.2" at 73.254,100.631 h2.03
  text "Chargebot Pvt Ltd" at 65.454,94.1 h2.54

## Text inside footprints (layer, text, board x,y; h text height)
U3: Top Component Outline "*" at 52.323,74.806 h0.64 r270
U5: Top Component Outline "*" at 72.877,60.294 h0.64 r90